# Altium PCB CSP_inFET.PcbDoc
Units mm, origin at the board's own origin, x right, y up, seen from the top; angles counter-clockwise.
Board outline 11.5 x 14 mm, 2 copper layers (Top Layer, Bottom Layer); 9 components, 28 nets, 14 pads, 3 vias.
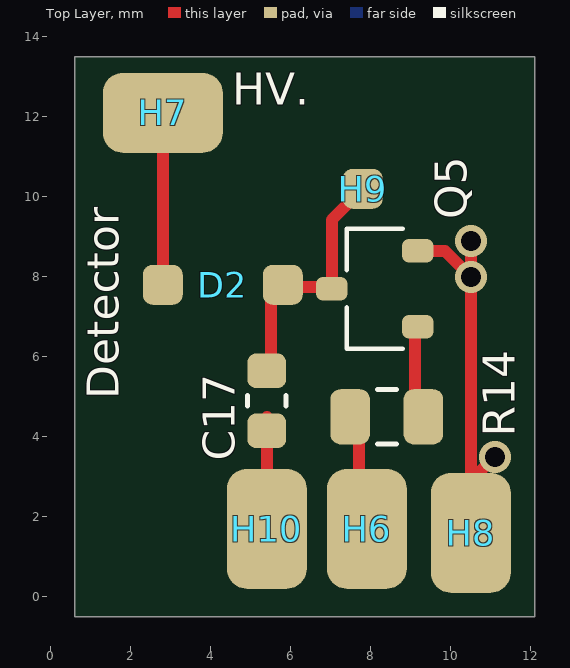
[diagram p0: Top Layer view]
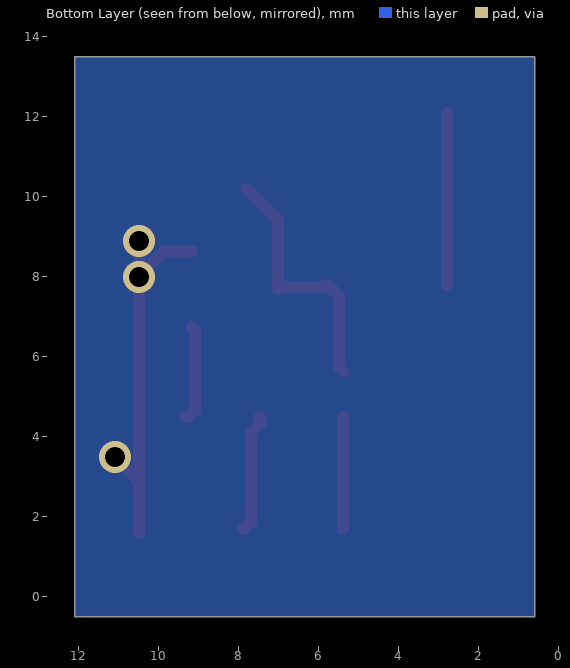
[diagram p1: Bottom Layer view, seen from below]
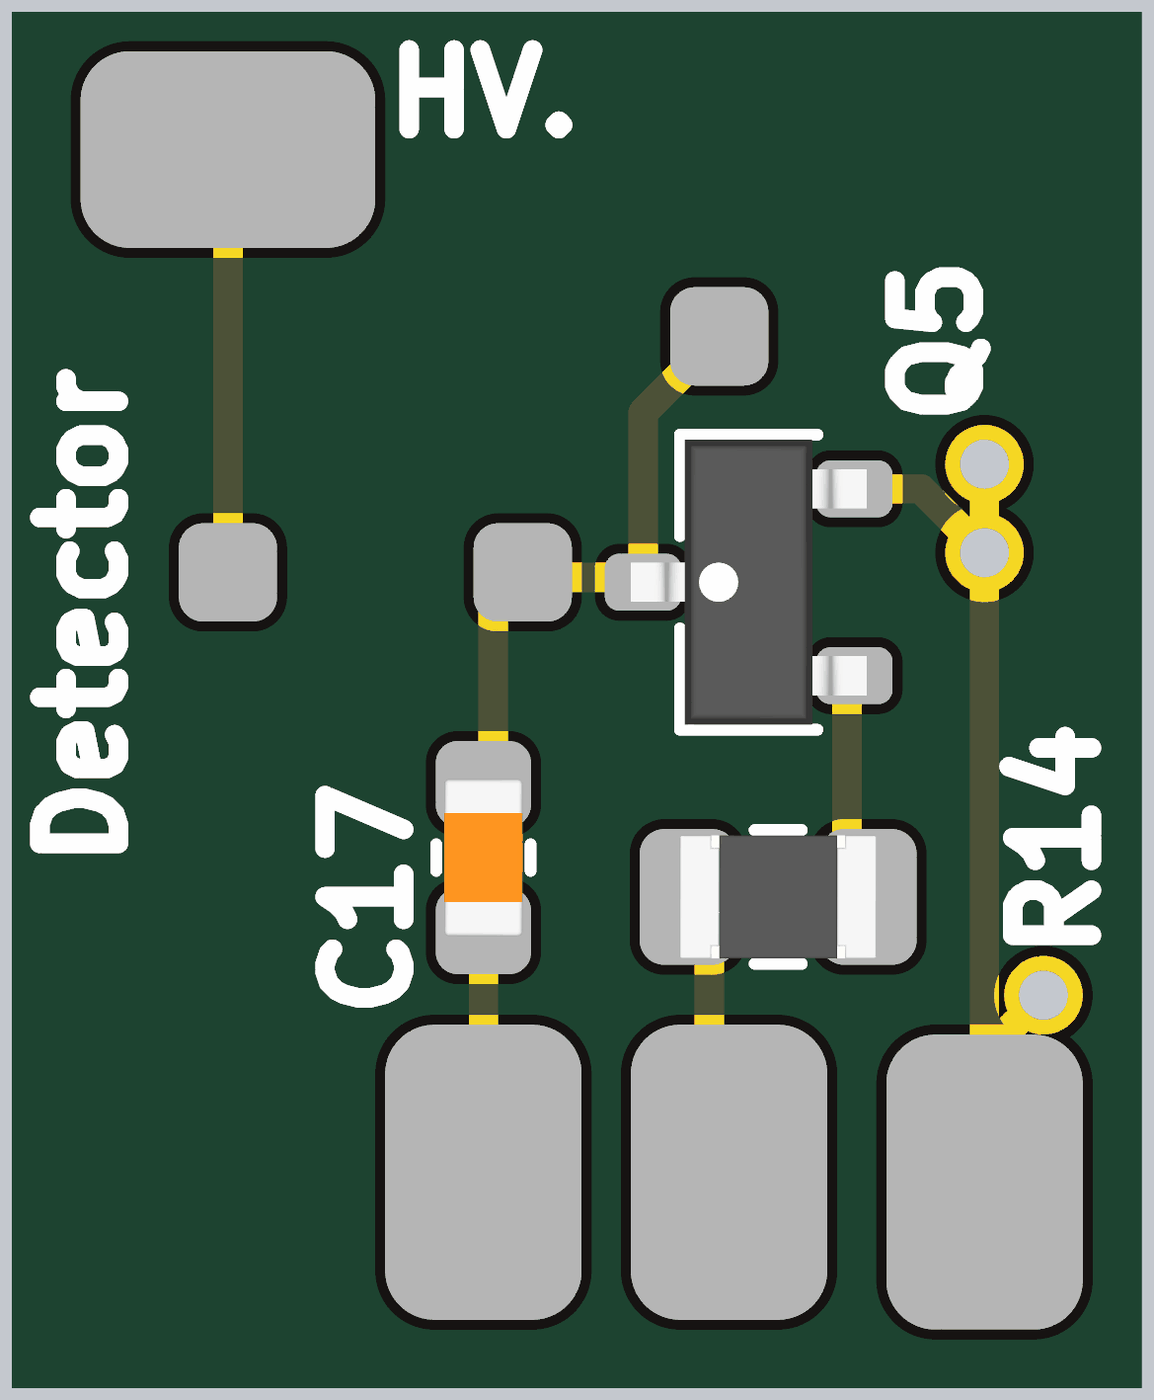
[diagram p2: 3D render of the assembled board from above, using the file's embedded part models]

## Layer stack, top to bottom
Top Solder: solder mask 0.0102, Solder Resist, Dk 3.5
Top Layer: signal copper 0.0356
Dielectric 1: dielectric 0.32, FR-4, Dk 4.8
Bottom Layer: signal copper 0.0356
Bottom Solder: solder mask 0.0102, Solder Resist, Dk 3.5

## Board outline
0.6,-0.5 12.1,-0.5 12.1,13.5 0.6,13.5

## Design rules (kind name [scope] priority, off if disabled: settings)
Clearance [All] p1: gap=0.3 ignorepadtopadclearanceinfootprint=FALSE except(0: Arc-Text Arc-Hole Track-Text Track-Hole SMDPad-Text SMDPad-Hole THPad-Text THPad-Hole Via-Text Via-Hole Fill-Text Fill-Hole Poly-Text Poly-Hole Region-Text Region-Hole Text-Text Text-Hole; 0.5: Track-Poly)
HoleSize [All] p1: absolutevalues=TRUE maxlimit=2.54 minlimit=0.406 maxpercent=80.000 minpercent=20.000
MinimumSolderMaskSliver [All] p1: minsoldermaskwidth=0.152
PlaneConnect [All] p1: planeconnectstyle=Direct reliefexpansion=0.508 reliefentries=4 reliefconductorwidth=0.254 reliefairgap=0.254
PolygonConnect [All] p1: connectstyle=Direct reliefconductorwidth=0.254 reliefentries=4 polygonreliefangle="90 Angle" airgapwidth=0.254
RoutingVias [All] p1: holewidth=0.711 width=1.27 viastyle="Through Hole" minholewidth=0.3 minwidth=0.6 maxholewidth=0.711 maxwidth=1.27
ShortCircuit ShortCircuit_1 [All] p1: allowed=FALSE
ShortCircuit TEXT [All] p2 off: allowed=TRUE
SilkToSilkClearance [All] p1 off: silktosilkclearance=0.254
SilkToSolderMaskClearance [IsPad] p1 off: minsilkscreentomaskgap=0.254 clearancetoexposedcopper=TRUE
SolderMaskExpansion [All] p1: expansion=0.102 istentingtop=FALSE
Width [All] p1: maxlimit=5 minlimit=0.254 preferedwidth=0.6 minimp=50.000000 maximp=50.000000 favimp=50.000000
24 further rules are at their usual default settings.

## Classes and differential pairs
component class CSP_inFET: C17 D2 H6 H7 H8 H10 Q5 R14

## Components (designator, comment, footprint, x,y, rotation, side; value= is the part's Value field where it differs from the comment)
C17 "Cap" CAPC160X80X90L35N 5.4,4.9 r90 top value=0.3pF
D2 "Detector" Detector 2.8,7.8 r0 top
H6 "PAD" PAD_rounded#1 7.9,1.7 r90 top
H7 "HV." PAD_rounded#1 2.8,12.1 r0 top
H8 "PAD" PAD_rounded#1 10.5,1.6 r90 top
H9 "TEST" PAD_rounded#2 7.8,10.2 r0 top
H10 "PAD" PAD_rounded#1 5.4,1.7 r270 top
Q5 "JFET-N" SOT23-3P95_240X114L20X40N 8.1,7.7 r90 top
R14 "" RESC200X125X70L40N 8.4,4.5 r180 top value=33

## Footprints (in the part's own frame and the unit in brackets; to place one, negate y for a bottom-side part, rotate by r counter-clockwise, add the part's x,y. Pads: shape width x height; smd on the part's side, far side on the other; paste and mask are expansions set on the pad)
CAPC160X80X90L35N [mm] "Capacitor, Chip; 1.60 mm L X 0.80 mm W X 0.90 mm H body"
  rrect51% 0.87x0.97 smd: 1(-0.75,0) 2(0.75,0)
  silkscreen extent -0.14,-0.48 0.14,0.48, body extent -0.8,-0.4 0.8,0.4, height 0.9
Detector [mm]
  rrect50% 1x1 smd: A(3,0) C(0,0)
  body extent -1.5,-1.5 1.5,1.5, height 1.1
PAD_rounded#1 [mm]
  rrect50% 3x2 smd: 1(0,0)
PAD_rounded#2 [mm]
  rrect50% 1x1 smd: 1(0,0)
RESC200X125X70L40N [mm] "Resistor, Chip; 2.00 mm L X 1.25 mm W X 0.70 mm H body"
  rrect51% 0.99x1.38 smd: 1(-0.915,0) 2(0.915,0)
  silkscreen extent -0.24,-0.68 0.24,0.68, body extent -1,-0.62 1,0.63, height 0.7
SOT23-3P95_240X114L20X40N [mm] "Small Outline Transistor (SOT23), 0.95 mm pitch; 3 pin, 2.90 mm L X 1.30 mm W X 1.14 mm H body"
  rrect52% 0.58x0.78 smd: 1(0,1.075) 2(0.95,-1.075) 3(-0.95,-1.075)
  silkscreen extent -1.5,-0.7 1.5,0.7, body extent -1.45,-1.2 1.45,1.2, height 1.14

## Part data
C17: "Capacitor", LatestRevisionDate=17-Jul-2002, LatestRevisionNote="Re-released for DXP Platform.", PackageDescription="Radial Cap, Thru-Hole; 2 Leads; 0.3 in Pin Spacing", PackageReference=RAD-0.3, Published=8-Jun-2000, Publisher="Altium Limited"
D2: library part Diode
H7 H9: library part PAD
Q5: "N-Channel JFET", Code_JEDEC=TO-254-AA, LatestRevisionDate=17-Jul-2002, LatestRevisionNote="Re-released for DXP Platform.", PackageReference=TO-254-AA, Published=8-Jun-2000, Publisher="Altium Limited"
R14: library part Res1, "Resistor", LatestRevisionDate=17-Jul-2002, LatestRevisionNote="Re-released for DXP Platform.", PackageDescription="Axial Device, Thru-Hole; 2 Leads; 0.3 in Pin Spacing", PackageReference=AXIAL-0.3, Published=8-Jun-2000, Publisher="Altium Limited"

## Via types
v1: diameter 0.8, hole 0.5, Top Layer to Bottom Layer, 3 vias

## Nets (pads, with @x,y where several pads share a name; then routed paths per layer and width w, separated by ;. In a path a pad name is that pad's centre, name@x,y a point inside that pad or via, vN(x,y) a via of type N, cw(c..) or ccw(c..) an arc to the next point about the centre after c; other vN are vias at no path point)
GND: 
GND_HF: H8.1 Q5.2 | length 9.7
  Top Layer w0.3: Q5.2 9.85,8.65 v1(10.5,8) ; H8.1 H8.1@10.5,2.9 ; v1(10.5,8.9) v1(10.5,8) ; v1(11.1,3.5) H8.1@10.5,2.9 ; H8.1@10.5,2.9 v1(10.5,8)
NetC1_2: 
NetC4_1: 
NetC6_1: 
NetC7_1: 
NetC8_1: 
NetC9_1: 
NetC10_1: 
NetC10_2: 
NetC12_2: 
NetC14_2: 
NetC17_1: C17.1 H10.1 | length 2.8
  Top Layer w0.3: H10.1 C17.1@5.4,4.5
NetC17_2: C17.2 D2.A H9.1 Q5.1 | length 6.4
  Top Layer w0.3: C17.2 5.5,5.75 5.5,7.524 5.7,7.724 5.724,7.724 D2.A 5.85,7.75 6.975,7.75 Q5.1 7.025,9.425 H9.1
NetD1_C: 
NetD2_C: D2.C H7.1 | length 4.3
  Top Layer w0.3: D2.C H7.1
NetH1_1: 
NetH3_1: 
NetH6_1: H6.1 R14.2 | length 3
  Top Layer w0.3: R14.2 7.485,4.351 7.459,4.326 7.7,4.085 7.7,1.876 7.876,1.7 H6.1
NetL2_2: 
NetOUT1_1: 
NetQ1_1: 
NetQ2_1: 
NetQ2_2: 
NetQ3_1: 
NetQ4_1: 
NetQ4_2: 
NetQ5_3: Q5.3 R14.1 | length 2.4
  Top Layer w0.3: Q5.3 9.1,6.675 9.1,4.676 9.276,4.5 R14.1

## Polygon pours and split planes (outlines as drawn)
no net on Top Layer "NONET_L-01_P-001" (solid, pour order 53): 1,4.1
no net on Top Layer "NONET_L-01_P-001" (solid, pour order 51): 0,13.6
no net on Top Layer "NONET_L-01_P-001" (solid, pour order 48): 13.589,8.763
no net on Top Layer "NONET_L01_P018" (solid, pour order 18): -0.254,27.178
no net on Top Layer "NONET_L01_P017" (solid, pour order 17): -0.254,27.559
no net on Top Layer "NONET_L01_P008" (solid, pour order 8): 7.366,93.726
no net on Top Layer "NONET_L01_P003" (solid, pour order 3): 37.338,78.232
no net on Top Layer "NONET_L01_P000" (solid, pour order 0): 28.702,86.36
GND_HF on Bottom Layer "NONET_L-01_P-001" (solid, pour order 54): 0.6,13.5 12.1,13.5 12.1,-0.5 0.6,-0.5
no net on Bottom Layer "NONET_L-01_P-001" (solid, pour order 46): 11.43,53.594
no net on Bottom Layer "NONET_L-01_P-001" (solid, pour order 44): 6.731,54.229
no net on Bottom Layer "NONET_L-01_P-001" (solid, pour order 43): 6.731,54.229 6.731,48.895

## Silkscreen, mask and mechanical layers (free items; w line width, h text height)
Mechanical 1:
  the board outline again, w0.3